# EAGLE board EC544 (EAGLE 9.6.2)
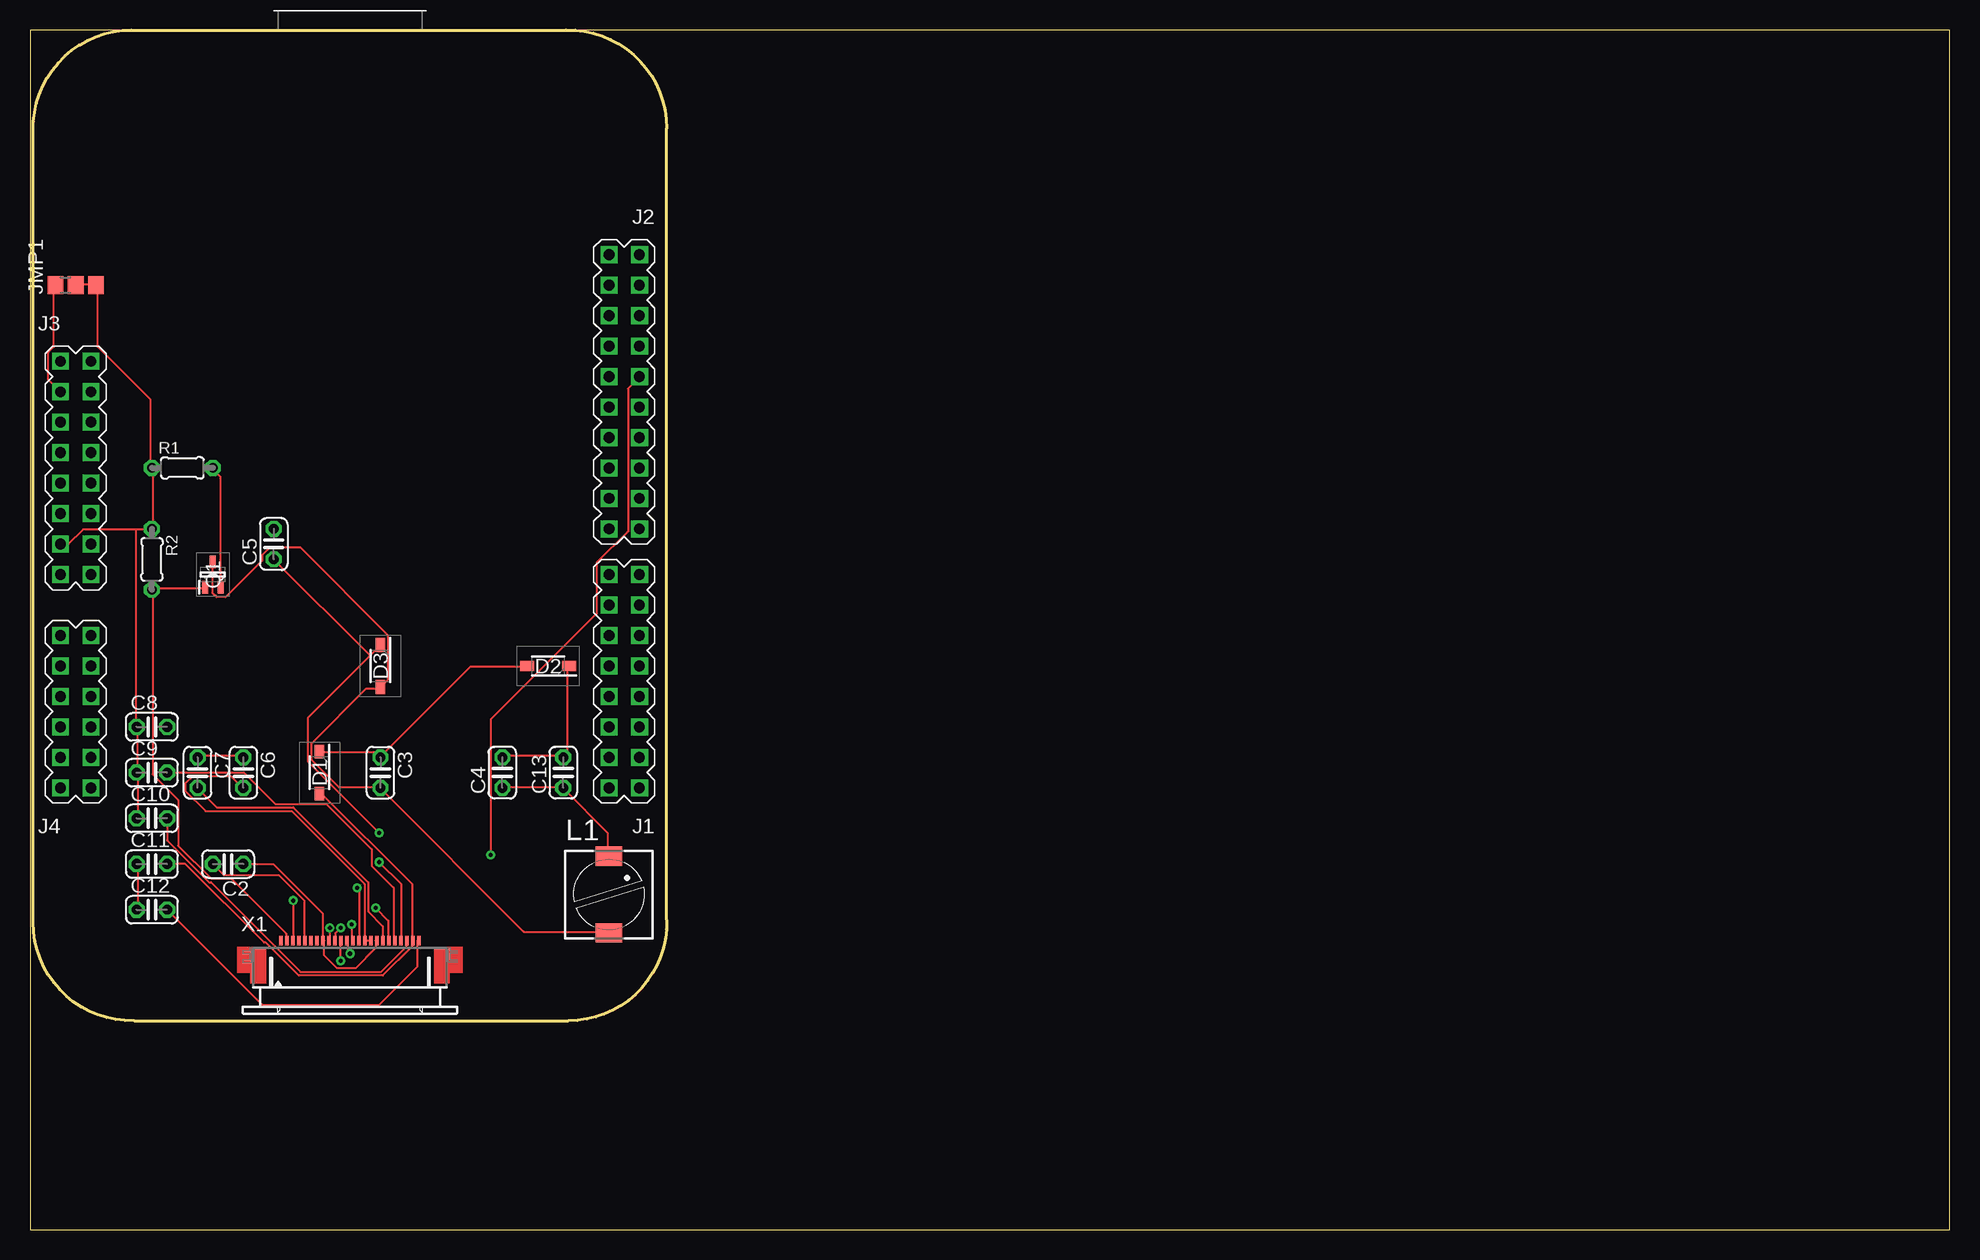
[diagram p0: board, top side]
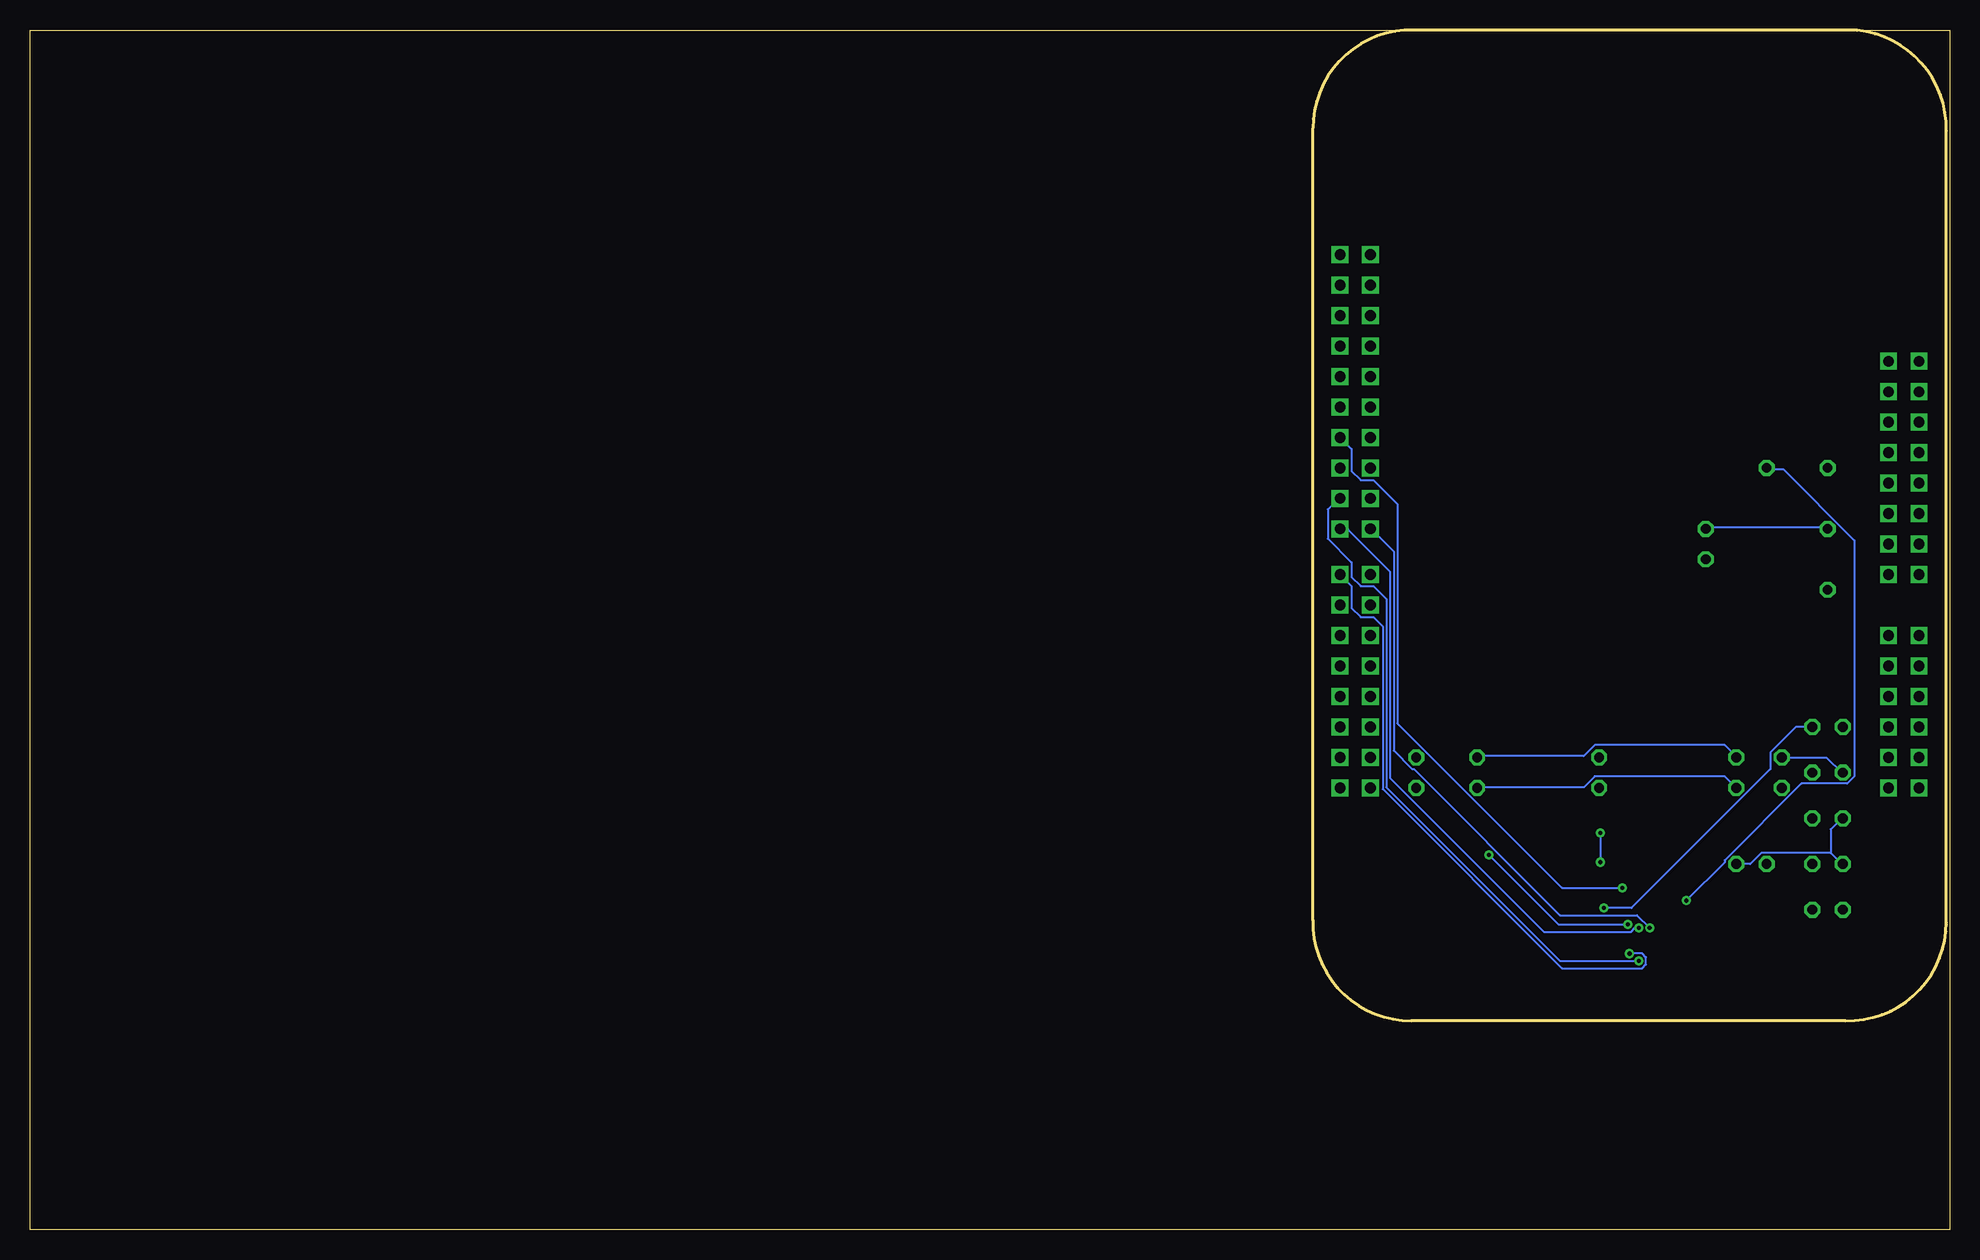
[diagram p1: board, bottom side, seen from below]

Size 160 x 100.01 mm. Coordinates in mm from the lower left corner, seen from the top.
Outline: 0,0 160,0 160,100 0,100 0,0
Copper layers (1*16): Top 0.035mm / dielectric 1.5mm / Bottom 0.035mm
Design rules "default": minimum track width 6mil, minimum drill 0.35mm, track to track 6mil, track to pad 6mil, pad to pad 6mil, via to via 6mil, smd to smd 6mil, copper to edge 40mil, drill to drill 6mil, minimum pad ring 10mil, minimum via ring 8mil, stop-mask expansion 4mil, vias tented up to drill 0mil, thermal gap 10mil

## Footprints (pad centres in the part's own frame; a part is rotated, then mirrored left to right if it is on the bottom)
C025-024X044 = drill 0.813 octagon: 1 -1.27,0; 2 1.27,0
SOD3716X135N = smd 1.15 x 0.8: 1 -1.75,0; 2 1.75,0
FRDM_K64F = drill 0.9 square: J1.1 -21.59,17.78; J1.2 -24.13,17.78; J1.3 -21.59,15.24; J1.4 -24.13,15.24; J1.5 -21.59,12.7; J1.6 -24.13,12.7; J1.7 -21.59,10.16; J1.8 -24.13,10.16; J1.9 -21.59,7.62; J1.10 -24.13,7.62; J1.11 -21.59,5.08; J1.12 -24.13,5.08; J1.13 -21.59,2.54; J1.14 -24.13,2.54; J1.15 -21.59,0; J1.16 -24.13,0; J2.1 -21.59,-3.81; J2.2 -24.13,-3.81; J2.3 -21.59,-6.35; J2.4 -24.13,-6.35; J2.5 -21.59,-8.89; J2.6 -24.13,-8.89; J2.7 -21.59,-11.43; J2.8 -24.13,-11.43; J2.9 -21.59,-13.97; J2.10 -24.13,-13.97; J2.11 -21.59,-16.51; J2.12 -24.13,-16.51; J2.13 -21.59,-19.05; J2.14 -24.13,-19.05; J2.15 -21.59,-21.59; J2.16 -24.13,-21.59; J2.17 -21.59,-24.13; J2.18 -24.13,-24.13; J2.19 -21.59,-26.67; J2.20 -24.13,-26.67; J3.1 21.59,-17.78; J3.2 24.13,-17.78; J3.3 21.59,-15.24; J3.4 24.13,-15.24; J3.5 21.59,-12.7; J3.6 24.13,-12.7; J3.7 21.59,-10.16; J3.8 24.13,-10.16; J3.9 21.59,-7.62; J3.10 24.13,-7.62; J3.11 21.59,-5.08; J3.12 24.13,-5.08; J3.13 21.59,-2.54; J3.14 24.13,-2.54; J3.15 21.59,0; J3.16 24.13,0; J4.1 21.59,5.08; J4.2 24.13,5.08; J4.3 21.59,7.62; J4.4 24.13,7.62; J4.5 21.59,10.16; J4.6 24.13,10.16; J4.7 21.59,12.7; J4.8 24.13,12.7; J4.9 21.59,15.24; J4.10 24.13,15.24; J4.11 21.59,17.78; J4.12 24.13,17.78
A0R-JMP = smd 1.5 x 1.3: 1 0,1.7; 2 0,0; 3 0,-1.7
PIS2816 = smd 2.2 x 1.6: 1 0,3.2; 2 0,-3.2
SOT65P210X110-3N = smd 1.05 x 0.5: 1 -1.05,0.65; 2 -1.05,-0.65; 3 1.05,0
0204/5 = drill 0.813 octagon: 1 -2.54,0; 2 2.54,0
52745-2490 = smd 0.3 x 0.8: 1 -5.75,2.5; 2 -5.25,2.5; 3 -4.75,2.5; 4 -4.25,2.5; 5 -3.75,2.5; 6 -3.25,2.5; 7 -2.75,2.5; 8 -2.25,2.5; 9 -1.75,2.5; 10 -1.25,2.5; 11 -0.75,2.5; 12 -0.25,2.5; 13 0.25,2.5; 14 0.75,2.5; 15 1.25,2.5; 16 1.75,2.5; 17 2.25,2.5; 18 2.75,2.5; 19 3.25,2.5; 20 3.75,2.5; 21 4.25,2.5; 22 4.75,2.5; 23 5.25,2.5; 24 5.75,2.5

## Placement (x,y rotation side)
C2  [C025-024X044]  16.51,30.48 180 top
C3  [C025-024X044]  29.21,38.1 270 top
C4  [C025-024X044]  39.37,38.1 90 top
C5  [C025-024X044]  20.32,57.15 90 top
C6  [C025-024X044]  17.78,38.1 270 top
C7  [C025-024X044]  13.97,38.1 270 top
C8  [C025-024X044]  10.16,41.91 0 top
C9  [C025-024X044]  10.16,38.1 0 top
C10  [C025-024X044]  10.16,34.29 0 top
C11  [C025-024X044]  10.16,30.48 0 top
C12  [C025-024X044]  10.16,26.67 0 top
C13  [C025-024X044]  44.45,38.1 90 top
D1  MBR0530  [SOD3716X135N]  24.13,38.1 270 top
D2  MBR0530  [SOD3716X135N]  43.18,46.99 180 top
D3  MBR0530  [SOD3716X135N]  29.21,46.99 270 top
FRDM1  [FRDM_K64F]  26.67,54.61 180 top
JMP1  0R-JUMPA  [A0R-JMP]  3.81,78.74 90 top
L1  [PIS2816]  48.26,27.94 0 top
Q1  SI1308EDL-T1-GE3  [SOT65P210X110-3N]  15.24,54.61 90 top
R1  [0204/5]  12.7,63.5 0 top
R2  [0204/5]  10.16,55.88 270 top
X1  52745-2490  [52745-2490]  26.67,21.59 0 top

## Library data of the parts
C2-C13 = rcl; SPICEPREFIX: C
D1-D3 = MBR0530; ARROW_PART_NUMBER: MBR0530; ARROW_PRICE-STOCK: https://www.arrow.com/en/products/mbr0530/on-semiconductor?region=nac; DESCRIPTION: ON SEMICONDUCTOR - MBR0530 - DIODE, SCHOTTKY, 0.5A, 30V, SOD-123; HEIGHT: 1.35mm; MANUFACTURER_NAME: ON Semiconductor; MANUFACTURER_PART_NUMBER: MBR0530; MOUSER_PART_NUMBER: 512-MBR0530; MOUSER_PRICE-STOCK: https://www.mouser.co.uk/ProductDetail/ON-Semiconductor-Fairchild/MBR0530?qs=VOMQJJE%252BBNniwJKcE3T43Q%3D%3D
FRDM1 = Freedom
JMP1 = jump-0r-smd
L1 = rcl; SPICEPREFIX: L
Q1 = Si1308EDL-T1-GE3; ARROW_PART_NUMBER: SI1308EDL-T1-GE3; ARROW_PRICE-STOCK: https://www.arrow.com/en/products/si1308edl-t1-ge3/vishay?region=nac; DESCRIPTION: MOSFET N-Ch 30V 1.5A TrenchFET SC70 Vishay Si1308EDL-T1-GE3 N-channel MOSFET Transistor, 1.5 A, 30 V, 3-Pin SC-70; HEIGHT: 1.1mm; MANUFACTURER_NAME: Vishay; MANUFACTURER_PART_NUMBER: Si1308EDL-T1-GE3; MOUSER_PART_NUMBER: 78-SI1308EDL-T1-GE3; MOUSER_PRICE-STOCK: https://www.mouser.co.uk/ProductDetail/Vishay-Semiconductors/SI1308EDL-T1-GE3?qs=bX1%252BNvsK%2FBramh9tgpOaEw%3D%3D
R1 R2 = rcl; SPICEPREFIX: R
X1 = con-molex; MF: MOLEX; OC_FARNELL: unknown; OC_NEWARK: unknown

## Nets
0: C2.1 C4.2 C5.2 C6.1 C7.1 C8.1 C9.1 C10.1 C11.1 C12.1 C13.2 D2.1 FRDM1.J3.14 JMP1.2 JMP1.3 R1.1 R2.1 X1.8 X1.17
N$1: C2.2 X1.5
N$2: C4.1 C6.2 C13.1 L1.1 X1.15 X1.16
N$3: C3.1 D1.1 D2.2
N$4: C7.2 X1.18
N$5: C9.2 X1.20
N$6: C10.2 X1.22
N$7: C11.2 D1.2 X1.23
N$8: C12.2 X1.24
N$9: C3.2 D3.2 L1.2 Q1.3
N$10: C5.1 D3.1 X1.21
N$11: Q1.1 R2.2 X1.2
N$12: Q1.2 R1.2 X1.3
N$13: FRDM1.J3.4 JMP1.1
N$14: FRDM1.J2.1 X1.9
N$16: FRDM1.J2.2 X1.10
N$17: FRDM1.J2.4 X1.11
N$18: FRDM1.J1.16 X1.12
N$19: FRDM1.J2.12 X1.13
N$20: FRDM1.J2.8 X1.14
N$21: C8.2 X1.19

## Tracks (layer width: path | path; a pad name or v marks a point on that pad's centre or on a via)
0
  Top 0.152: JMP1.2 3.81,78.79 5.49,78.79 JMP1.3 5.64,78.64 5.64,73.61 10.06,69.19 10.06,63.55 R1.1 10.21,63.4 10.21,58.52 R2.1 10.06,58.37 8.84,58.37 | FRDM1.J3.14 3.2,57.15 4.42,58.37 8.84,58.37 | X1.17 28.8,24.08 28.8,23.47 27.13,21.79 25.6,21.79 24.54,22.86 24.54,24.08 X1.8 24.38,24.23 24.38,26.36 20.27,30.48 C2.1 | C12.1 8.99,26.67 8.99,30.48 C11.1 | D2.1 44.81,46.94 44.81,39.78 44.5,39.47 C13.2 44.35,39.47 39.47,39.47 C4.2 | C7.1 14.02,39.47 17.68,39.47 C6.1 | 8.99,38.1 8.99,34.29 C10.1 | 8.99,38.1 8.99,41.91 C8.1 8.84,41.91 8.84,58.37 | 8.99,38.1 C9.1
  Bottom 0.152: C5.2 20.27,58.52 10.21,58.52 R2.1 | C2.1 16.61,30.48 15.7,31.39 9.91,31.39 | 9.91,31.39 8.99,30.48 C11.1 | C7.1 13.87,39.32 10.21,39.32 8.99,38.1 C9.1 | C4.2 39.32,39.47 30.48,39.47 29.57,40.39 18.75,40.39 17.83,39.47 C6.1 | 9.91,31.39 9.91,33.38 8.99,34.29 C10.1
N$1
  Top 0.152: C2.2 16.15,29.57 20.73,29.57 22.86,27.43 22.86,24.23 X1.5
N$2
  Top 0.152: L1.1 48.16,31.24 48.16,33.07 44.5,36.73 C13.1 44.35,36.88 39.47,36.88 C4.1 | X1.16 28.35,24.08 28.04,24.08 X1.15 27.89,24.23 27.89,28.8 21.79,34.9 14.63,34.9 12.95,36.58 12.95,37.19 13.56,37.8 16.76,37.8 17.68,36.88 C6.2
  Bottom 0.152: C6.2 18.75,37.8 29.57,37.8 30.48,36.88 39.32,36.88 C4.1
N$3
  Top 0.152: D1.1 24.23,39.78 28.8,39.78 C3.1 29.26,39.47 36.73,46.94 41.3,46.94 D2.2
N$4
  Top 0.152: X1.18 29.41,24.23 29.41,25.3 28.19,26.52 28.19,28.96 21.95,35.2 15.54,35.2 14.02,36.73 C7.2
N$5
  Top 0.152: C9.2 17.83,38.1 20.42,35.51 24.69,35.51 28.5,31.7 28.5,30.33 30.33,28.5 30.33,24.23 X1.20
N$6
  Top 0.152: C10.2 11.43,32.46 14.94,28.96 15.09,28.96 22.55,21.49 29.26,21.49 31.39,23.62 31.39,24.08 X1.22
N$7
  Top 0.152: D1.2 24.23,36.42 31.85,28.8 31.85,24.23 X1.23 31.85,24.08 31.85,23.62 29.41,21.18 22.4,21.18 19.66,23.93 19.51,23.93 12.95,30.48 C11.2
N$8
  Top 0.152: C12.2 19.36,18.75 29.11,18.75 32.31,21.95 32.31,24.08 X1.24
N$9
  Top 0.152: Q1.3 15.24,53.03 15.54,52.73 16.31,52.73 19.36,55.78 19.36,56.24 19.96,56.84 22.55,56.84 29.87,49.53 29.87,45.87 29.26,45.26 D3.2 29.11,45.11 28.04,45.11 23.47,40.54 23.47,39.17 25.76,36.88 29.11,36.88 C3.2 29.26,36.73 41.15,24.84 48.16,24.84 L1.2
N$10  (via drill 0.35)
  Top 0.152: v29.11,30.63 30.94,28.8 30.94,24.23 X1.21 | v29.11,33.07 23.16,39.01 23.16,42.67 28.35,47.85 | 28.35,47.85 29.11,48.62 D3.1 | 28.35,47.85 C5.1
  Bottom 0.152: v29.11,33.07 v29.11,30.63
N$11
  Top 0.152: 10.21,53.34 10.21,37.95 12.34,35.81 12.34,32 15.09,29.26 16.76,29.26 21.34,24.69 21.34,24.23 X1.2 | 10.21,53.34 10.36,53.49 14.48,53.49 Q1.1 | 10.21,53.34 R2.2
N$12  (via drill 0.35)
  Top 0.152: v21.95,27.43 21.95,24.23 X1.3 | Q1.2 15.85,53.65 15.85,62.79 15.24,63.4 R1.2
  Bottom 0.152: v21.95,27.43 18.75,30.63 18.75,30.79 12.34,37.19 8.53,37.19 7.92,37.8 7.92,57.45 13.87,63.4 15.24,63.4 R1.2
N$13
  Top 0.152: FRDM1.J3.4 1.52,70.87 1.52,73.15 1.98,73.61 1.98,78.64 JMP1.1
N$14  (via drill 0.35)
  Top 0.152: v24.99,25.15 24.99,24.23 X1.9
  Bottom 0.152: v24.99,25.15 26.06,26.21 32.46,26.21 44.65,38.41 44.81,38.41 46.33,39.93 46.33,56.54 48.16,58.37 FRDM1.J2.1
N$16  (via drill 0.35)
  Top 0.152: v25.91,25.15 25.45,24.69 25.45,24.23 X1.10
  Bottom 0.152: v25.91,25.15 26.21,25.15 26.52,24.84 33.83,24.84 46.63,37.64 46.63,54.86 50.14,58.37 50.75,58.37 FRDM1.J2.2
N$17  (via drill 0.35)
  Top 0.152: v25.91,22.4 25.91,24.08 X1.11
  Bottom 0.152: v25.91,22.4 32.46,22.4 46.94,36.88 46.94,52.58 48.01,53.65 49.07,53.65 49.84,54.41 49.84,55.63 51.82,57.61 51.82,60.05 50.9,60.96 FRDM1.J2.4
N$18  (via drill 0.35)
  Top 0.152: v26.67,23.01 26.52,23.16 26.52,24.08 X1.12
  Bottom 0.152: v26.67,23.01 25.6,23.01 25.3,22.71 25.3,22.1 25.6,21.79 32.31,21.79 47.24,36.73 47.24,50.29 48.01,51.05 49.07,51.05 49.84,51.82 49.84,53.65 FRDM1.J1.16
N$19  (via drill 0.35)
  Top 0.152: v26.82,25.45 26.82,24.23 X1.13 | v38.41,31.24 38.41,42.52 47.24,51.36 47.24,55.63 49.84,58.22 49.84,70.1 50.75,71.02 FRDM1.J2.12
  Bottom 0.152: v26.82,25.45 32.61,25.45 v38.41,31.24
N$20  (via drill 0.35)
  Top 0.152: v27.28,28.5 27.43,28.35 27.43,24.23 X1.14
  Bottom 0.152: v27.28,28.5 32.31,28.5 46.02,42.22 46.02,60.5 48.01,62.48 49.07,62.48 49.84,63.25 49.84,65.08 FRDM1.J2.8
N$21  (via drill 0.35)
  Top 0.152: v28.8,26.82 29.87,25.76 29.87,24.23 X1.19
  Bottom 0.152: v28.8,26.82 26.52,26.82 14.94,38.41 14.94,39.78 12.8,41.91 C8.2